# Altium PCB S52最小系统.PcbDoc (part 3 of 9)
Units mm, origin at the board's own origin, x right, y up, seen from the top; angles counter-clockwise.
Board outline 152.4 x 101.6 mm, 2 copper layers (Top Layer, Bottom Layer); 29 components, 53 nets, 176 pads, 2 vias.
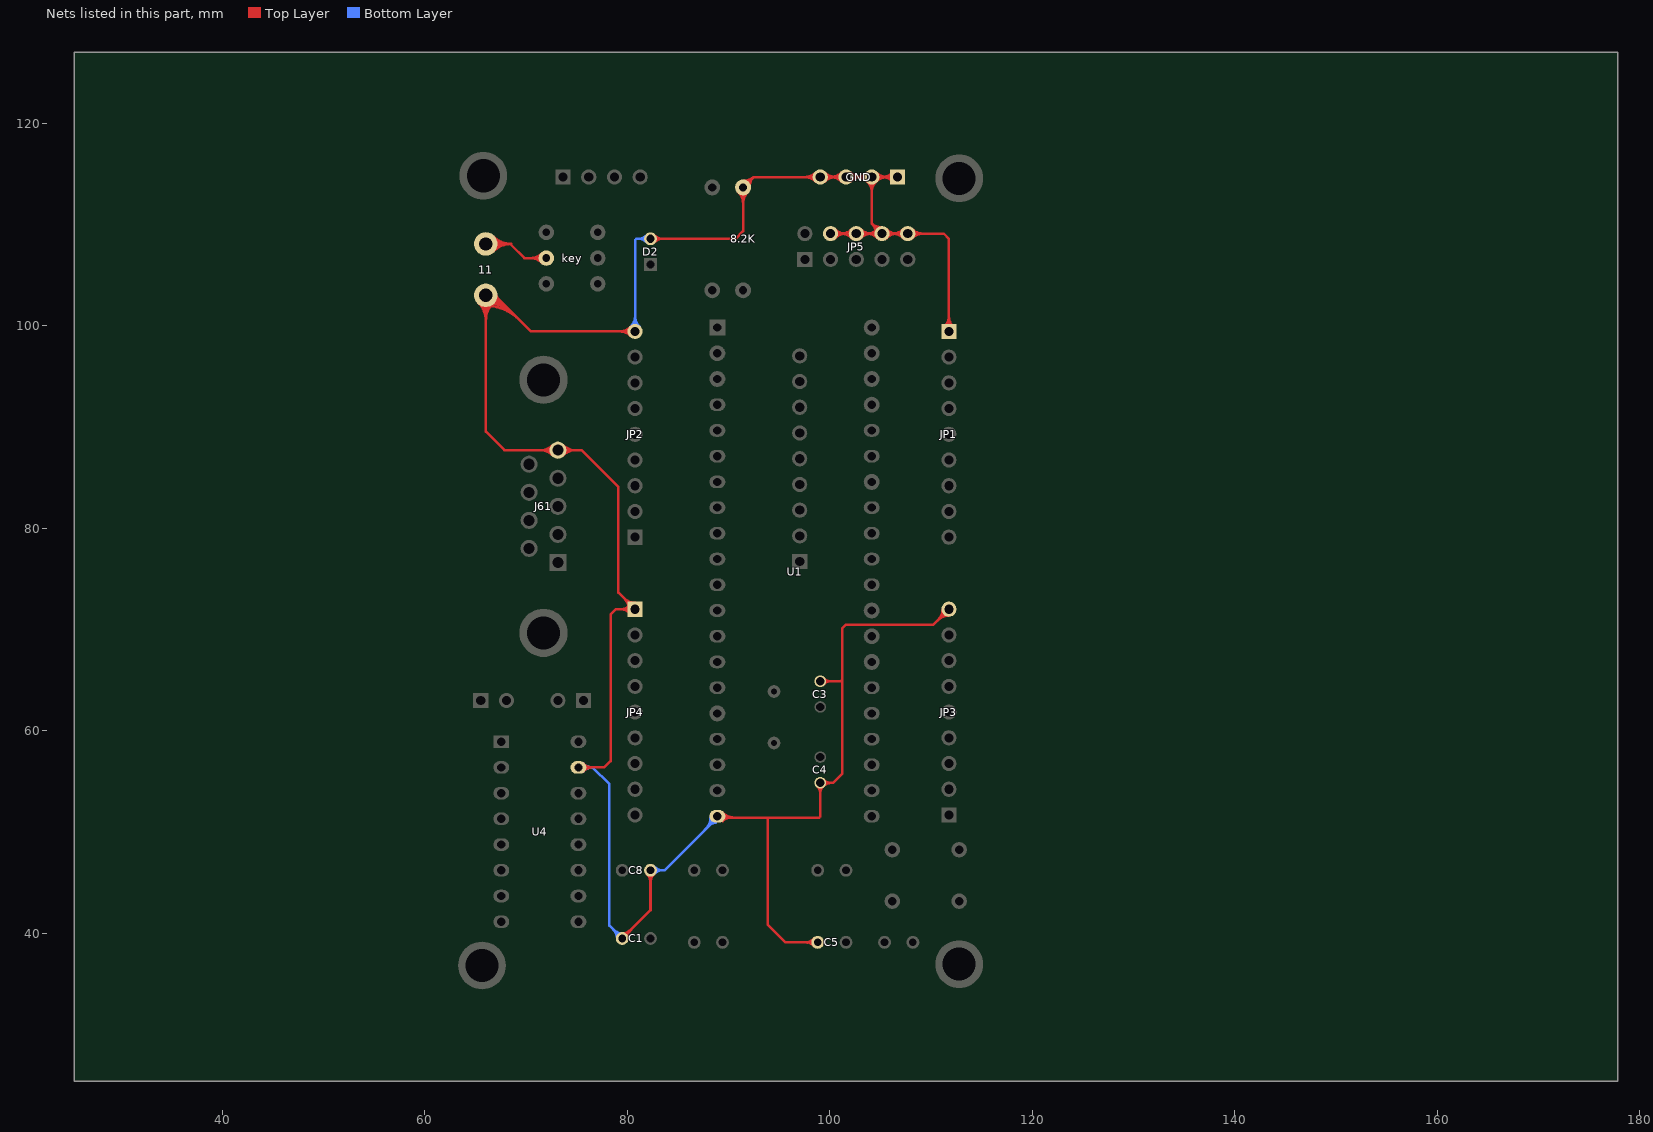
[diagram p3: the nets of this part, all layers, seen from the top]

## Via types
v1: diameter 1.27, hole 0.711, Top Layer to Bottom Layer, 2 vias

## Nets (pads, with @x,y where several pads share a name; then routed paths per layer and width w, separated by ;. In a path a pad name is that pad's centre, name@x,y a point inside that pad or via, vN(x,y) a via of type N, cw(c..) or ccw(c..) an arc to the next point about the centre after c; other vN are vias at no path point) (continued)
GND: (continued)
  Top Layer w0.254: 103.652,109.093 ccw(c103.652,110.597) JP5.8@104.715,109.534 ; 103.652,109.093 cw(c103.652,107.589) JP5.8@104.715,108.652 ; 103.652,109.093 ccw(c103.652,110.597) JP5.8@104.715,109.534 ; 103.652,109.093 cw(c103.652,107.589) JP5.8@104.715,108.652 ; 103.652,109.093 ccw(c103.652,110.597) JP5.8@104.715,109.534 ; 103.652,109.093 ccw(c103.652,110.597) JP5.8@104.715,109.534 ; 103.652,109.093 cw(c103.652,107.589) JP5.8@104.715,108.652 ; 103.652,109.093 ccw(c103.652,110.597) JP5.8@104.715,109.534 ; 103.652,109.093 cw(c103.652,107.589) JP5.8@104.715,108.652 ; 103.652,109.093 ccw(c103.652,110.597) JP5.8@104.715,109.534 ; 103.652,109.093 cw(c103.652,107.589) JP5.8@104.715,108.652 ; 103.652,109.093 ccw(c103.652,110.597) JP5.8@104.715,109.534 ; 103.652,109.093 cw(c103.652,107.589) JP5.8@104.715,108.652 ; 103.652,109.093 ccw(c103.652,110.597) JP5.8@104.715,109.534 ; 103.652,109.093 cw(c103.652,107.589) JP5.8@104.715,108.652 ; 103.652,109.093 ccw(c103.652,110.597) JP5.8@104.715,109.534 ; 103.652,109.093 cw(c103.652,107.589) JP5.8@104.715,108.652 ; 103.652,109.093 ccw(c103.652,110.597) JP5.8@104.715,109.534 ; 103.652,109.093 cw(c103.652,107.589) JP5.8@104.715,108.652 ; GND.2@103.699,114.24 cw(c102.636,113.177) 104.14,113.177 ; GND.2@103.699,114.24 cw(c102.636,113.177) 104.14,113.177 ; GND.2@103.699,114.24 cw(c102.636,113.177) 104.14,113.177 ; GND.2@103.699,114.24 cw(c102.636,113.177) 104.14,113.177 ; GND.2@103.699,114.24 cw(c102.636,113.177) 104.14,113.177 ; GND.2@103.699,114.24 cw(c102.636,113.177) 104.14,113.177 ; GND.2@103.699,114.24 cw(c102.636,113.177) 104.14,113.177 ; GND.2@103.699,114.24 cw(c102.636,113.177) 104.14,113.177 ; GND.2@103.699,114.24 cw(c102.636,113.177) 104.14,113.177 ; GND.2@103.699,114.24 cw(c102.636,113.177) 104.14,113.177 ; GND.2@103.879,114.42 cw(c103.249,113.79) 104.14,113.79 ; GND.2@103.879,114.42 cw(c103.249,113.79) 104.14,113.79 ; GND.2@103.879,114.42 cw(c103.249,113.79) 104.14,113.79 ; GND.2@103.879,114.42 cw(c103.249,113.79) 104.14,113.79 ; GND.2@103.879,114.42 cw(c103.249,113.79) 104.14,113.79 ; GND.2@103.879,114.42 cw(c103.249,113.79) 104.14,113.79 ; GND.2@103.879,114.42 cw(c103.249,113.79) 104.14,113.79 ; GND.2@103.879,114.42 cw(c103.249,113.79) 104.14,113.79 ; GND.2@103.879,114.42 cw(c103.249,113.79) 104.14,113.79 ; GND.2@103.879,114.42 cw(c103.249,113.79) 104.14,113.79 ; 104.14,110.109 cw(c103.189,109.158) JP5.8@104.533,109.113 ; 104.14,110.109 ccw(c105.091,111.06) JP5.8@105.136,109.716 ; 104.14,110.109 cw(c103.189,109.158) JP5.8@104.533,109.113 ; 104.14,110.109 ccw(c105.091,111.06) JP5.8@105.136,109.716 ; 104.14,110.109 cw(c103.189,109.158) JP5.8@104.533,109.113 ; 104.14,110.109 ccw(c105.091,111.06) JP5.8@105.136,109.716 ; 104.14,110.109 ccw(c105.091,111.06) JP5.8@105.136,109.716 ; 104.14,110.109 cw(c103.189,109.158) JP5.8@104.533,109.113 ; 104.14,110.109 ccw(c105.091,111.06) JP5.8@105.136,109.716 ; 104.14,110.109 cw(c103.189,109.158) JP5.8@104.533,109.113 ; 104.14,110.109 ccw(c105.091,111.06) JP5.8@105.136,109.716 ; 104.14,110.109 cw(c103.189,109.158) JP5.8@104.533,109.113 ; 104.14,110.109 ccw(c105.091,111.06) JP5.8@105.136,109.716 ; 104.14,110.109 cw(c103.189,109.158) JP5.8@104.533,109.113 ; 104.14,110.109 ccw(c105.091,111.06) JP5.8@105.136,109.716 ; 104.14,110.109 cw(c103.189,109.158) JP5.8@104.533,109.113 ; 104.14,110.109 ccw(c105.091,111.06) JP5.8@105.136,109.716 ; 104.14,110.109 cw(c103.189,109.158) JP5.8@104.533,109.113 ; 104.14,110.109 ccw(c105.091,111.06) JP5.8@105.136,109.716 ; 104.14,110.109 cw(c103.189,109.158) JP5.8@104.533,109.113 ; 104.14,113.177 cw(c105.644,113.177) GND.2@104.581,114.24 ; 104.14,113.177 cw(c105.644,113.177) GND.2@104.581,114.24 ; 104.14,113.177 cw(c105.644,113.177) GND.2@104.581,114.24 ; 104.14,113.177 cw(c105.644,113.177) GND.2@104.581,114.24 ; 104.14,113.177 cw(c105.644,113.177) GND.2@104.581,114.24 ; 104.14,113.177 cw(c105.644,113.177) GND.2@104.581,114.24 ; 104.14,113.177 cw(c105.644,113.177) GND.2@104.581,114.24 ; 104.14,113.177 cw(c105.644,113.177) GND.2@104.581,114.24 ; 104.14,113.177 cw(c105.644,113.177) GND.2@104.581,114.24 ; 104.14,113.177 cw(c105.644,113.177) GND.2@104.581,114.24 ; 104.14,113.79 cw(c105.031,113.79) GND.2@104.401,114.42 ; 104.14,113.79 cw(c105.031,113.79) GND.2@104.401,114.42 ; 104.14,113.79 cw(c105.031,113.79) GND.2@104.401,114.42 ; 104.14,113.79 cw(c105.031,113.79) GND.2@104.401,114.42 ; 104.14,113.79 cw(c105.031,113.79) GND.2@104.401,114.42 ; 104.14,113.79 cw(c105.031,113.79) GND.2@104.401,114.42 ; 104.14,113.79 cw(c105.031,113.79) GND.2@104.401,114.42 ; 104.14,113.79 cw(c105.031,113.79) GND.2@104.401,114.42 ; 104.14,113.79 cw(c105.031,113.79) GND.2@104.401,114.42 ; 104.14,113.79 cw(c105.031,113.79) GND.2@104.401,114.42 ; 104.265,109.093 cw(c104.265,108.202) JP5.8@104.895,108.832 ; 104.265,109.093 ccw(c104.265,109.984) JP5.8@104.895,109.354 ; 104.265,109.093 cw(c104.265,108.202) JP5.8@104.895,108.832 ; 104.265,109.093 ccw(c104.265,109.984) JP5.8@104.895,109.354 ; 104.265,109.093 cw(c104.265,108.202) JP5.8@104.895,108.832 ; 104.265,109.093 ccw(c104.265,109.984) JP5.8@104.895,109.354 ; 104.265,109.093 ccw(c104.265,109.984) JP5.8@104.895,109.354 ; 104.265,109.093 cw(c104.265,108.202) JP5.8@104.895,108.832 ; 104.265,109.093 ccw(c104.265,109.984) JP5.8@104.895,109.354 ; 104.265,109.093 cw(c104.265,108.202) JP5.8@104.895,108.832 ; 104.265,109.093 ccw(c104.265,109.984) JP5.8@104.895,109.354 ; 104.265,109.093 cw(c104.265,108.202) JP5.8@104.895,108.832 ; 104.265,109.093 ccw(c104.265,109.984) JP5.8@104.895,109.354 ; 104.265,109.093 cw(c104.265,108.202) JP5.8@104.895,108.832 ; 104.265,109.093 ccw(c104.265,109.984) JP5.8@104.895,109.354 ; 104.265,109.093 cw(c104.265,108.202) JP5.8@104.895,108.832 ; 104.265,109.093 ccw(c104.265,109.984) JP5.8@104.895,109.354 ; 104.265,109.093 cw(c104.265,108.202) JP5.8@104.895,108.832 ; 104.265,109.093 ccw(c104.265,109.984) JP5.8@104.895,109.354 ; 104.265,109.093 cw(c104.265,108.202) JP5.8@104.895,108.832 ; GND.2@104.401,114.42 cw(c105.031,113.79) 105.031,114.681 ; GND.2@104.401,114.42 cw(c105.031,113.79) 105.031,114.681 ; GND.2@104.401,114.42 cw(c105.031,113.79) 105.031,114.681 ; GND.2@104.401,114.42 cw(c105.031,113.79) 105.031,114.681 ; GND.2@104.401,114.42 cw(c105.031,113.79) 105.031,114.681 ; GND.2@104.401,114.42 cw(c105.031,113.79) 105.031,114.681 ; GND.2@104.401,114.42 cw(c105.031,113.79) 105.031,114.681 ; GND.2@104.401,114.42 cw(c105.031,113.79) 105.031,114.681 ; GND.2@104.401,114.42 cw(c105.031,113.79) 105.031,114.681 ; GND.2@104.401,114.42 cw(c105.031,113.79) 105.031,114.681 ; GND.2@104.401,114.942 ccw(c105.031,115.572) 105.031,114.681 ; GND.2@104.401,114.942 ccw(c105.031,115.572) 105.031,114.681 ; GND.2@104.401,114.942 ccw(c105.031,115.572) 105.031,114.681 ; GND.2@104.401,114.942 ccw(c105.031,115.572) 105.031,114.681 ; GND.2@104.401,114.942 ccw(c105.031,115.572) 105.031,114.681 ; GND.2@104.401,114.942 ccw(c105.031,115.572) 105.031,114.681 ; GND.2@104.401,114.942 ccw(c105.031,115.572) 105.031,114.681 ; GND.2@104.401,114.942 ccw(c105.031,115.572) 105.031,114.681 ; GND.2@104.401,114.942 ccw(c105.031,115.572) 105.031,114.681 ; GND.2@104.401,114.942 ccw(c105.031,115.572) 105.031,114.681 ; 104.554,109.695 cw(c103.991,109.131) JP5.8@104.787,109.105 ; 104.554,109.695 ccw(c105.118,110.258) JP5.8@105.144,109.462 ; 104.554,109.695 cw(c103.991,109.131) JP5.8@104.787,109.105 ; 104.554,109.695 ccw(c105.118,110.258) JP5.8@105.144,109.462 ; 104.554,109.695 cw(c103.991,109.131) JP5.8@104.787,109.105 ; 104.554,109.695 ccw(c105.118,110.258) JP5.8@105.144,109.462 ; 104.554,109.695 ccw(c105.118,110.258) JP5.8@105.144,109.462 ; 104.554,109.695 cw(c103.991,109.131) JP5.8@104.787,109.105 ; 104.554,109.695 ccw(c105.118,110.258) JP5.8@105.144,109.462 ; 104.554,109.695 cw(c103.991,109.131) JP5.8@104.787,109.105 ; 104.554,109.695 ccw(c105.118,110.258) JP5.8@105.144,109.462 ; 104.554,109.695 cw(c103.991,109.131) JP5.8@104.787,109.105 ; 104.554,109.695 ccw(c105.118,110.258) JP5.8@105.144,109.462 ; 104.554,109.695 cw(c103.991,109.131) JP5.8@104.787,109.105 ; 104.554,109.695 ccw(c105.118,110.258) JP5.8@105.144,109.462 ; 104.554,109.695 cw(c103.991,109.131) JP5.8@104.787,109.105 ; 104.554,109.695 ccw(c105.118,110.258) JP5.8@105.144,109.462 ; 104.554,109.695 cw(c103.991,109.131) JP5.8@104.787,109.105 ; 104.554,109.695 ccw(c105.118,110.258) JP5.8@105.144,109.462 ; 104.554,109.695 cw(c103.991,109.131) JP5.8@104.787,109.105 ; GND.2@104.581,114.24 cw(c105.644,113.177) 105.644,114.681 ; GND.2@104.581,114.24 cw(c105.644,113.177) 105.644,114.681 ; GND.2@104.581,114.24 cw(c105.644,113.177) 105.644,114.681 ; GND.2@104.581,114.24 cw(c105.644,113.177) 105.644,114.681 ; GND.2@104.581,114.24 cw(c105.644,113.177) 105.644,114.681 ; GND.2@104.581,114.24 cw(c105.644,113.177) 105.644,114.681 ; GND.2@104.581,114.24 cw(c105.644,113.177) 105.644,114.681 ; GND.2@104.581,114.24 cw(c105.644,113.177) 105.644,114.681 ; GND.2@104.581,114.24 cw(c105.644,113.177) 105.644,114.681 ; GND.2@104.581,114.24 cw(c105.644,113.177) 105.644,114.681 ; GND.2@104.581,115.122 ccw(c105.644,116.185) 105.644,114.681 ; GND.2@104.581,115.122 ccw(c105.644,116.185) 105.644,114.681 ; GND.2@104.581,115.122 ccw(c105.644,116.185) 105.644,114.681 ; GND.2@104.581,115.122 ccw(c105.644,116.185) 105.644,114.681 ; GND.2@104.581,115.122 ccw(c105.644,116.185) 105.644,114.681 ; GND.2@104.581,115.122 ccw(c105.644,116.185) 105.644,114.681 ; GND.2@104.581,115.122 ccw(c105.644,116.185) 105.644,114.681 ; GND.2@104.581,115.122 ccw(c105.644,116.185) 105.644,114.681 ; GND.2@104.581,115.122 ccw(c105.644,116.185) 105.644,114.681 ; GND.2@104.581,115.122 ccw(c105.644,116.185) 105.644,114.681 ; 105.176,114.681 cw(c105.176,113.177) GND.1@106.239,114.24 ; 105.176,114.681 ccw(c105.176,116.185) GND.1@106.239,115.122 ; 105.176,114.681 cw(c105.176,113.177) GND.1@106.239,114.24 ; 105.176,114.681 ccw(c105.176,116.185) GND.1@106.239,115.122 ; 105.176,114.681 cw(c105.176,113.177) GND.1@106.239,114.24 ; 105.176,114.681 ccw(c105.176,116.185) GND.1@106.239,115.122 ; 105.176,114.681 ccw(c105.176,116.185) GND.1@106.239,115.122 ; 105.176,114.681 cw(c105.176,113.177) GND.1@106.239,114.24 ; 105.176,114.681 ccw(c105.176,116.185) GND.1@106.239,115.122 ; 105.176,114.681 cw(c105.176,113.177) GND.1@106.239,114.24 ; 105.176,114.681 ccw(c105.176,116.185) GND.1@106.239,115.122 ; 105.176,114.681 cw(c105.176,113.177) GND.1@106.239,114.24 ; 105.176,114.681 ccw(c105.176,116.185) GND.1@106.239,115.122 ; 105.176,114.681 cw(c105.176,113.177) GND.1@106.239,114.24 ; 105.176,114.681 ccw(c105.176,116.185) GND.1@106.239,115.122 ; 105.176,114.681 cw(c105.176,113.177) GND.1@106.239,114.24 ; 105.176,114.681 ccw(c105.176,116.185) GND.1@106.239,115.122 ; 105.176,114.681 cw(c105.176,113.177) GND.1@106.239,114.24 ; 105.176,114.681 ccw(c105.176,116.185) GND.1@106.239,115.122 ; 105.176,114.681 cw(c105.176,113.177) GND.1@106.239,114.24 ; JP5.8@105.417,108.832 cw(c106.047,108.202) 106.047,109.093 ; JP5.8@105.417,108.832 cw(c106.047,108.202) 106.047,109.093 ; JP5.8@105.417,108.832 cw(c106.047,108.202) 106.047,109.093 ; JP5.8@105.417,108.832 cw(c106.047,108.202) 106.047,109.093 ; JP5.8@105.417,108.832 cw(c106.047,108.202) 106.047,109.093 ; JP5.8@105.417,108.832 cw(c106.047,108.202) 106.047,109.093 ; JP5.8@105.417,108.832 cw(c106.047,108.202) 106.047,109.093 ; JP5.8@105.417,108.832 cw(c106.047,108.202) 106.047,109.093 ; JP5.8@105.417,108.832 cw(c106.047,108.202) 106.047,109.093 ; JP5.8@105.417,108.832 cw(c106.047,108.202) 106.047,109.093 ; JP5.8@105.417,109.354 ccw(c106.047,109.984) 106.047,109.093 ; JP5.8@105.417,109.354 ccw(c106.047,109.984) 106.047,109.093 ; JP5.8@105.417,109.354 ccw(c106.047,109.984) 106.047,109.093 ; JP5.8@105.417,109.354 ccw(c106.047,109.984) 106.047,109.093 ; JP5.8@105.417,109.354 ccw(c106.047,109.984) 106.047,109.093 ; JP5.8@105.417,109.354 ccw(c106.047,109.984) 106.047,109.093 ; JP5.8@105.417,109.354 ccw(c106.047,109.984) 106.047,109.093 ; JP5.8@105.417,109.354 ccw(c106.047,109.984) 106.047,109.093 ; JP5.8@105.417,109.354 ccw(c106.047,109.984) 106.047,109.093 ; JP5.8@105.417,109.354 ccw(c106.047,109.984) 106.047,109.093 ; JP5.8@105.597,108.652 cw(c106.66,107.589) 106.66,109.093 ; JP5.8@105.597,108.652 cw(c106.66,107.589) 106.66,109.093 ; JP5.8@105.597,108.652 cw(c106.66,107.589) 106.66,109.093 ; JP5.8@105.597,108.652 cw(c106.66,107.589) 106.66,109.093 ; JP5.8@105.597,108.652 cw(c106.66,107.589) 106.66,109.093 ; JP5.8@105.597,108.652 cw(c106.66,107.589) 106.66,109.093 ; JP5.8@105.597,108.652 cw(c106.66,107.589) 106.66,109.093 ; JP5.8@105.597,108.652 cw(c106.66,107.589) 106.66,109.093 ; JP5.8@105.597,108.652 cw(c106.66,107.589) 106.66,109.093 ; JP5.8@105.597,108.652 cw(c106.66,107.589) 106.66,109.093 ; JP5.8@105.597,109.534 ccw(c106.66,110.597) 106.66,109.093 ; JP5.8@105.597,109.534 ccw(c106.66,110.597) 106.66,109.093 ; JP5.8@105.597,109.534 ccw(c106.66,110.597) 106.66,109.093 ; JP5.8@105.597,109.534 ccw(c106.66,110.597) 106.66,109.093 ; JP5.8@105.597,109.534 ccw(c106.66,110.597) 106.66,109.093 ; JP5.8@105.597,109.534 ccw(c106.66,110.597) 106.66,109.093 ; JP5.8@105.597,109.534 ccw(c106.66,110.597) 106.66,109.093 ; JP5.8@105.597,109.534 ccw(c106.66,110.597) 106.66,109.093 ; JP5.8@105.597,109.534 ccw(c106.66,110.597) 106.66,109.093 ; JP5.8@105.597,109.534 ccw(c106.66,110.597) 106.66,109.093 ; 105.789,114.681 cw(c105.789,113.79) GND.1@106.419,114.42 ; 105.789,114.681 ccw(c105.789,115.572) GND.1@106.419,114.942 ; 105.789,114.681 cw(c105.789,113.79) GND.1@106.419,114.42 ; 105.789,114.681 ccw(c105.789,115.572) GND.1@106.419,114.942 ; 105.789,114.681 cw(c105.789,113.79) GND.1@106.419,114.42 ; 105.789,114.681 ccw(c105.789,115.572) GND.1@106.419,114.942 ; 105.789,114.681 ccw(c105.789,115.572) GND.1@106.419,114.942 ; 105.789,114.681 cw(c105.789,113.79) GND.1@106.419,114.42 ; 105.789,114.681 ccw(c105.789,115.572) GND.1@106.419,114.942 ; 105.789,114.681 cw(c105.789,113.79) GND.1@106.419,114.42 ; 105.789,114.681 ccw(c105.789,115.572) GND.1@106.419,114.942 ; 105.789,114.681 cw(c105.789,113.79) GND.1@106.419,114.42 ; 105.789,114.681 ccw(c105.789,115.572) GND.1@106.419,114.942 ; 105.789,114.681 cw(c105.789,113.79) GND.1@106.419,114.42 ; 105.789,114.681 ccw(c105.789,115.572) GND.1@106.419,114.942 ; 105.789,114.681 cw(c105.789,113.79) GND.1@106.419,114.42 ; 105.789,114.681 ccw(c105.789,115.572) GND.1@106.419,114.942 ; 105.789,114.681 cw(c105.789,113.79) GND.1@106.419,114.42 ; 105.789,114.681 ccw(c105.789,115.572) GND.1@106.419,114.942 ; 105.789,114.681 cw(c105.789,113.79) GND.1@106.419,114.42 ; 106.192,109.093 cw(c106.192,107.589) JP5.10@107.255,108.652 ; 106.192,109.093 ccw(c106.192,110.597) JP5.10@107.255,109.534 ; 106.192,109.093 cw(c106.192,107.589) JP5.10@107.255,108.652 ; 106.192,109.093 ccw(c106.192,110.597) JP5.10@107.255,109.534 ; 106.192,109.093 cw(c106.192,107.589) JP5.10@107.255,108.652 ; 106.192,109.093 ccw(c106.192,110.597) JP5.10@107.255,109.534 ; 106.192,109.093 ccw(c106.192,110.597) JP5.10@107.255,109.534 ; 106.192,109.093 cw(c106.192,107.589) JP5.10@107.255,108.652 ; 106.192,109.093 ccw(c106.192,110.597) JP5.10@107.255,109.534 ; 106.192,109.093 cw(c106.192,107.589) JP5.10@107.255,108.652 ; 106.192,109.093 ccw(c106.192,110.597) JP5.10@107.255,109.534 ; 106.192,109.093 cw(c106.192,107.589) JP5.10@107.255,108.652 ; 106.192,109.093 ccw(c106.192,110.597) JP5.10@107.255,109.534 ; 106.192,109.093 cw(c106.192,107.589) JP5.10@107.255,108.652 ; 106.192,109.093 ccw(c106.192,110.597) JP5.10@107.255,109.534 ; 106.192,109.093 cw(c106.192,107.589) JP5.10@107.255,108.652 ; 106.192,109.093 ccw(c106.192,110.597) JP5.10@107.255,109.534 ; 106.192,109.093 cw(c106.192,107.589) JP5.10@107.255,108.652 ; 106.192,109.093 ccw(c106.192,110.597) JP5.10@107.255,109.534 ; 106.192,109.093 cw(c106.192,107.589) JP5.10@107.255,108.652 ; 106.805,109.093 cw(c106.805,108.202) JP5.10@107.435,108.832 ; 106.805,109.093 ccw(c106.805,109.984) JP5.10@107.435,109.354 ; 106.805,109.093 cw(c106.805,108.202) JP5.10@107.435,108.832 ; 106.805,109.093 ccw(c106.805,109.984) JP5.10@107.435,109.354 ; 106.805,109.093 cw(c106.805,108.202) JP5.10@107.435,108.832 ; 106.805,109.093 ccw(c106.805,109.984) JP5.10@107.435,109.354 ; 106.805,109.093 ccw(c106.805,109.984) JP5.10@107.435,109.354 ; 106.805,109.093 cw(c106.805,108.202) JP5.10@107.435,108.832 ; 106.805,109.093 ccw(c106.805,109.984) JP5.10@107.435,109.354 ; 106.805,109.093 cw(c106.805,108.202) JP5.10@107.435,108.832 ; 106.805,109.093 ccw(c106.805,109.984) JP5.10@107.435,109.354 ; 106.805,109.093 cw(c106.805,108.202) JP5.10@107.435,108.832 ; 106.805,109.093 ccw(c106.805,109.984) JP5.10@107.435,109.354 ; 106.805,109.093 cw(c106.805,108.202) JP5.10@107.435,108.832 ; 106.805,109.093 ccw(c106.805,109.984) JP5.10@107.435,109.354 ; 106.805,109.093 cw(c106.805,108.202) JP5.10@107.435,108.832 ; 106.805,109.093 ccw(c106.805,109.984) JP5.10@107.435,109.354 ; 106.805,109.093 cw(c106.805,108.202) JP5.10@107.435,108.832 ; 106.805,109.093 ccw(c106.805,109.984) JP5.10@107.435,109.354 ; 106.805,109.093 cw(c106.805,108.202) JP5.10@107.435,108.832 ; JP5.10@107.957,108.832 cw(c108.587,108.202) 108.587,109.093 ; JP5.10@107.957,108.832 cw(c108.587,108.202) 108.587,109.093 ; JP5.10@107.957,108.832 cw(c108.587,108.202) 108.587,109.093 ; JP5.10@107.957,108.832 cw(c108.587,108.202) 108.587,109.093 ; JP5.10@107.957,108.832 cw(c108.587,108.202) 108.587,109.093 ; JP5.10@107.957,108.832 cw(c108.587,108.202) 108.587,109.093 ; JP5.10@107.957,108.832 cw(c108.587,108.202) 108.587,109.093 ; JP5.10@107.957,108.832 cw(c108.587,108.202) 108.587,109.093 ; JP5.10@107.957,108.832 cw(c108.587,108.202) 108.587,109.093 ; JP5.10@107.957,108.832 cw(c108.587,108.202) 108.587,109.093 ; JP5.10@107.957,109.354 ccw(c108.587,109.984) 108.587,109.093 ; JP5.10@107.957,109.354 ccw(c108.587,109.984) 108.587,109.093 ; JP5.10@107.957,109.354 ccw(c108.587,109.984) 108.587,109.093 ; JP5.10@107.957,109.354 ccw(c108.587,109.984) 108.587,109.093 ; JP5.10@107.957,109.354 ccw(c108.587,109.984) 108.587,109.093 ; JP5.10@107.957,109.354 ccw(c108.587,109.984) 108.587,109.093 ; JP5.10@107.957,109.354 ccw(c108.587,109.984) 108.587,109.093 ; JP5.10@107.957,109.354 ccw(c108.587,109.984) 108.587,109.093 ; JP5.10@107.957,109.354 ccw(c108.587,109.984) 108.587,109.093 ; JP5.10@107.957,109.354 ccw(c108.587,109.984) 108.587,109.093 ; JP5.10@108.137,108.652 cw(c109.2,107.589) 109.2,109.093 ; JP5.10@108.137,108.652 cw(c109.2,107.589) 109.2,109.093 ; JP5.10@108.137,108.652 cw(c109.2,107.589) 109.2,109.093 ; JP5.10@108.137,108.652 cw(c109.2,107.589) 109.2,109.093 ; JP5.10@108.137,108.652 cw(c109.2,107.589) 109.2,109.093 ; JP5.10@108.137,108.652 cw(c109.2,107.589) 109.2,109.093 ; JP5.10@108.137,108.652 cw(c109.2,107.589) 109.2,109.093 ; JP5.10@108.137,108.652 cw(c109.2,107.589) 109.2,109.093 ; JP5.10@108.137,108.652 cw(c109.2,107.589) 109.2,109.093 ; JP5.10@108.137,108.652 cw(c109.2,107.589) 109.2,109.093 ; JP5.10@108.137,109.534 ccw(c109.2,110.597) 109.2,109.093 ; JP5.10@108.137,109.534 ccw(c109.2,110.597) 109.2,109.093 ; JP5.10@108.137,109.534 ccw(c109.2,110.597) 109.2,109.093 ; JP5.10@108.137,109.534 ccw(c109.2,110.597) 109.2,109.093 ; JP5.10@108.137,109.534 ccw(c109.2,110.597) 109.2,109.093 ; JP5.10@108.137,109.534 ccw(c109.2,110.597) 109.2,109.093 ; JP5.10@108.137,109.534 ccw(c109.2,110.597) 109.2,109.093 ; JP5.10@108.137,109.534 ccw(c109.2,110.597) 109.2,109.093 ; JP5.10@108.137,109.534 ccw(c109.2,110.597) 109.2,109.093 ; JP5.10@108.137,109.534 ccw(c109.2,110.597) 109.2,109.093 ; 110.696,70.945 cw(c111.76,69.882) JP3.9@111.76,71.386 ; 110.696,70.945 ccw(c109.633,72.009) JP3.9@111.137,72.009 ; 110.696,70.945 cw(c111.76,69.882) JP3.9@111.76,71.386 ; 110.696,70.945 ccw(c109.633,72.009) JP3.9@111.137,72.009 ; 110.696,70.945 cw(c111.76,69.882) JP3.9@111.76,71.386 ; 110.696,70.945 ccw(c109.633,72.009) JP3.9@111.137,72.009 ; 110.696,70.945 ccw(c109.633,72.009) JP3.9@111.137,72.009 ; 110.696,70.945 cw(c111.76,69.882) JP3.9@111.76,71.386 ; 110.696,70.945 ccw(c109.633,72.009) JP3.9@111.137,72.009 ; 110.696,70.945 cw(c111.76,69.882) JP3.9@111.76,71.386 ; 110.696,70.945 ccw(c109.633,72.009) JP3.9@111.137,72.009 ; 110.696,70.945 cw(c111.76,69.882) JP3.9@111.76,71.386 ; 110.696,70.945 ccw(c109.633,72.009) JP3.9@111.137,72.009 ; 110.696,70.945 cw(c111.76,69.882) JP3.9@111.76,71.386 ; 110.696,70.945 ccw(c109.633,72.009) JP3.9@111.137,72.009 ; 110.696,70.945 cw(c111.76,69.882) JP3.9@111.76,71.386 ; 110.696,70.945 ccw(c109.633,72.009) JP3.9@111.137,72.009 ; 110.696,70.945 cw(c111.76,69.882) JP3.9@111.76,71.386 ; 110.696,70.945 ccw(c109.633,72.009) JP3.9@111.137,72.009 ; 110.696,70.945 cw(c111.76,69.882) JP3.9@111.76,71.386 ; 111.13,71.379 cw(c111.76,70.749) JP3.9@111.76,71.64 ; 111.13,71.379 ccw(c110.5,72.009) JP3.9@111.391,72.009 ; 111.13,71.379 cw(c111.76,70.749) JP3.9@111.76,71.64 ; 111.13,71.379 ccw(c110.5,72.009) JP3.9@111.391,72.009 ; 111.13,71.379 cw(c111.76,70.749) JP3.9@111.76,71.64 ; 111.13,71.379 ccw(c110.5,72.009) JP3.9@111.391,72.009 ; 111.13,71.379 ccw(c110.5,72.009) JP3.9@111.391,72.009 ; 111.13,71.379 cw(c111.76,70.749) JP3.9@111.76,71.64 ; 111.13,71.379 ccw(c110.5,72.009) JP3.9@111.391,72.009 ; 111.13,71.379 cw(c111.76,70.749) JP3.9@111.76,71.64 ; 111.13,71.379 ccw(c110.5,72.009) JP3.9@111.391,72.009 ; 111.13,71.379 cw(c111.76,70.749) JP3.9@111.76,71.64 ; 111.13,71.379 ccw(c110.5,72.009) JP3.9@111.391,72.009 ; 111.13,71.379 cw(c111.76,70.749) JP3.9@111.76,71.64 ; 111.13,71.379 ccw(c110.5,72.009) JP3.9@111.391,72.009 ; 111.13,71.379 cw(c111.76,70.749) JP3.9@111.76,71.64 ; 111.13,71.379 ccw(c110.5,72.009) JP3.9@111.391,72.009 ; 111.13,71.379 cw(c111.76,70.749) JP3.9@111.76,71.64 ; 111.13,71.379 ccw(c110.5,72.009) JP3.9@111.391,72.009 ; 111.13,71.379 cw(c111.76,70.749) JP3.9@111.76,71.64 ; JP1.1@111.319,99.882 ccw(c110.256,100.945) 111.76,100.945 ; JP1.1@111.319,99.882 ccw(c110.256,100.945) 111.76,100.945 ; JP1.1@111.319,99.882 ccw(c110.256,100.945) 111.76,100.945 ; JP1.1@111.319,99.882 ccw(c110.256,100.945) 111.76,100.945 ; JP1.1@111.319,99.882 ccw(c110.256,100.945) 111.76,100.945 ; JP1.1@111.319,99.882 ccw(c110.256,100.945) 111.76,100.945 ; JP1.1@111.319,99.882 ccw(c110.256,100.945) 111.76,100.945 ; JP1.1@111.319,99.882 ccw(c110.256,100.945) 111.76,100.945 ; JP1.1@111.319,99.882 ccw(c110.256,100.945) 111.76,100.945 ; JP1.1@111.319,99.882 ccw(c110.256,100.945) 111.76,100.945 ; JP1.1@111.499,99.702 ccw(c110.869,100.332) 111.76,100.332 ; JP1.1@111.499,99.702 ccw(c110.869,100.332) 111.76,100.332 ; JP1.1@111.499,99.702 ccw(c110.869,100.332) 111.76,100.332 ; JP1.1@111.499,99.702 ccw(c110.869,100.332) 111.76,100.332 ; JP1.1@111.499,99.702 ccw(c110.869,100.332) 111.76,100.332 ; JP1.1@111.499,99.702 ccw(c110.869,100.332) 111.76,100.332 ; JP1.1@111.499,99.702 ccw(c110.869,100.332) 111.76,100.332 ; JP1.1@111.499,99.702 ccw(c110.869,100.332) 111.76,100.332 ; JP1.1@111.499,99.702 ccw(c110.869,100.332) 111.76,100.332 ; JP1.1@111.499,99.702 ccw(c110.869,100.332) 111.76,100.332 ; 111.76,100.332 ccw(c112.651,100.332) JP1.1@112.021,99.702 ; 111.76,100.332 ccw(c112.651,100.332) JP1.1@112.021,99.702 ; 111.76,100.332 ccw(c112.651,100.332) JP1.1@112.021,99.702 ; 111.76,100.332 ccw(c112.651,100.332) JP1.1@112.021,99.702 ; 111.76,100.332 ccw(c112.651,100.332) JP1.1@112.021,99.702 ; 111.76,100.332 ccw(c112.651,100.332) JP1.1@112.021,99.702 ; 111.76,100.332 ccw(c112.651,100.332) JP1.1@112.021,99.702 ; 111.76,100.332 ccw(c112.651,100.332) JP1.1@112.021,99.702 ; 111.76,100.332 ccw(c112.651,100.332) JP1.1@112.021,99.702 ; 111.76,100.332 ccw(c112.651,100.332) JP1.1@112.021,99.702 ; 111.76,100.945 ccw(c113.264,100.945) JP1.1@112.201,99.882 ; 111.76,100.945 ccw(c113.264,100.945) JP1.1@112.201,99.882 ; 111.76,100.945 ccw(c113.264,100.945) JP1.1@112.201,99.882 ; 111.76,100.945 ccw(c113.264,100.945) JP1.1@112.201,99.882 ; 111.76,100.945 ccw(c113.264,100.945) JP1.1@112.201,99.882 ; 111.76,100.945 ccw(c113.264,100.945) JP1.1@112.201,99.882 ; 111.76,100.945 ccw(c113.264,100.945) JP1.1@112.201,99.882 ; 111.76,100.945 ccw(c113.264,100.945) JP1.1@112.201,99.882 ; 111.76,100.945 ccw(c113.264,100.945) JP1.1@112.201,99.882 ; 111.76,100.945 ccw(c113.264,100.945) JP1.1@112.201,99.882
  Bottom Layer w0.254: U4.15@75.18,56.387 76.582,56.387 78.232,54.737 78.232,40.767 C1.2@79.502,39.497 ; JP2.9@80.772,99.441 80.772,108.458 80.899,108.585 D2.2@82.296,108.585 ; C8.1@82.296,46.228 83.69,46.228 U1.20@88.896,51.434 ; U4.15@75.695,56.035 cw(c76.545,55.185) 76.545,56.387 ; U4.15@75.695,56.035 cw(c76.545,55.185) 76.545,56.387 ; U4.15@75.695,56.035 cw(c76.545,55.185) 76.545,56.387 ; U4.15@75.695,56.035 cw(c76.545,55.185) 76.545,56.387 ; U4.15@75.695,56.035 cw(c76.545,55.185) 76.545,56.387 ; U4.15@75.695,56.035 cw(c76.545,55.185) 76.545,56.387 ; U4.15@75.695,56.035 cw(c76.545,55.185) 76.545,56.387 ; U4.15@75.695,56.035 cw(c76.545,55.185) 76.545,56.387 ; U4.15@75.695,56.035 cw(c76.545,55.185) 76.545,56.387 ; U4.15@75.695,56.035 cw(c76.545,55.185) 76.545,56.387 ; U4.15@75.695,56.739 ccw(c76.545,57.589) 76.545,56.387 ; U4.15@75.695,56.739 ccw(c76.545,57.589) 76.545,56.387 ; U4.15@75.695,56.739 ccw(c76.545,57.589) 76.545,56.387 ; U4.15@75.695,56.739 ccw(c76.545,57.589) 76.545,56.387 ; U4.15@75.695,56.739 ccw(c76.545,57.589) 76.545,56.387 ; U4.15@75.695,56.739 ccw(c76.545,57.589) 76.545,56.387 ; U4.15@75.695,56.739 ccw(c76.545,57.589) 76.545,56.387 ; U4.15@75.695,56.739 ccw(c76.545,57.589) 76.545,56.387 ; U4.15@75.695,56.739 ccw(c76.545,57.589) 76.545,56.387 ; U4.15@75.695,56.739 ccw(c76.545,57.589) 76.545,56.387 ; 78.635,40.364 cw(c77.768,39.497) C1.2@78.994,39.497 ; 78.635,40.364 ccw(c79.502,41.231) C1.2@79.502,40.005 ; 78.635,40.364 cw(c77.768,39.497) C1.2@78.994,39.497 ; 78.635,40.364 ccw(c79.502,41.231) C1.2@79.502,40.005 ; 78.635,40.364 cw(c77.768,39.497) C1.2@78.994,39.497 ; 78.635,40.364 ccw(c79.502,41.231) C1.2@79.502,40.005 ; 78.635,40.364 ccw(c79.502,41.231) C1.2@79.502,40.005 ; 78.635,40.364 cw(c77.768,39.497) C1.2@78.994,39.497 ; 78.635,40.364 ccw(c79.502,41.231) C1.2@79.502,40.005 ; 78.635,40.364 cw(c77.768,39.497) C1.2@78.994,39.497 ; 78.635,40.364 ccw(c79.502,41.231) C1.2@79.502,40.005 ; 78.635,40.364 cw(c77.768,39.497) C1.2@78.994,39.497 ; 78.635,40.364 ccw(c79.502,41.231) C1.2@79.502,40.005 ; 78.635,40.364 cw(c77.768,39.497) C1.2@78.994,39.497 ; 78.635,40.364 ccw(c79.502,41.231) C1.2@79.502,40.005 ; 78.635,40.364 cw(c77.768,39.497) C1.2@78.994,39.497 ; 78.635,40.364 ccw(c79.502,41.231) C1.2@79.502,40.005 ; 78.635,40.364 cw(c77.768,39.497) C1.2@78.994,39.497 ; 78.635,40.364 ccw(c79.502,41.231) C1.2@79.502,40.005 ; 78.635,40.364 cw(c77.768,39.497) C1.2@78.994,39.497 ; JP2.9@80.331,99.882 ccw(c79.268,100.945) 80.772,100.945 ; JP2.9@80.331,99.882 ccw(c79.268,100.945) 80.772,100.945 ; JP2.9@80.331,99.882 ccw(c79.268,100.945) 80.772,100.945 ; JP2.9@80.331,99.882 ccw(c79.268,100.945) 80.772,100.945 ; JP2.9@80.331,99.882 ccw(c79.268,100.945) 80.772,100.945 ; JP2.9@80.331,99.882 ccw(c79.268,100.945) 80.772,100.945 ; JP2.9@80.331,99.882 ccw(c79.268,100.945) 80.772,100.945 ; JP2.9@80.331,99.882 ccw(c79.268,100.945) 80.772,100.945 ; JP2.9@80.331,99.882 ccw(c79.268,100.945) 80.772,100.945 ; JP2.9@80.331,99.882 ccw(c79.268,100.945) 80.772,100.945 ; JP2.9@80.511,99.702 ccw(c79.881,100.332) 80.772,100.332 ; JP2.9@80.511,99.702 ccw(c79.881,100.332) 80.772,100.332 ; JP2.9@80.511,99.702 ccw(c79.881,100.332) 80.772,100.332 ; JP2.9@80.511,99.702 ccw(c79.881,100.332) 80.772,100.332 ; JP2.9@80.511,99.702 ccw(c79.881,100.332) 80.772,100.332 ; JP2.9@80.511,99.702 ccw(c79.881,100.332) 80.772,100.332 ; JP2.9@80.511,99.702 ccw(c79.881,100.332) 80.772,100.332 ; JP2.9@80.511,99.702 ccw(c79.881,100.332) 80.772,100.332 ; JP2.9@80.511,99.702 ccw(c79.881,100.332) 80.772,100.332 ; JP2.9@80.511,99.702 ccw(c79.881,100.332) 80.772,100.332 ; 80.772,100.332 ccw(c81.663,100.332) JP2.9@81.033,99.702 ; 80.772,100.332 ccw(c81.663,100.332) JP2.9@81.033,99.702 ; 80.772,100.332 ccw(c81.663,100.332) JP2.9@81.033,99.702 ; 80.772,100.332 ccw(c81.663,100.332) JP2.9@81.033,99.702 ; 80.772,100.332 ccw(c81.663,100.332) JP2.9@81.033,99.702 ; 80.772,100.332 ccw(c81.663,100.332) JP2.9@81.033,99.702 ; 80.772,100.332 ccw(c81.663,100.332) JP2.9@81.033,99.702 ; 80.772,100.332 ccw(c81.663,100.332) JP2.9@81.033,99.702 ; 80.772,100.332 ccw(c81.663,100.332) JP2.9@81.033,99.702 ; 80.772,100.332 ccw(c81.663,100.332) JP2.9@81.033,99.702 ; 80.772,100.945 ccw(c82.276,100.945) JP2.9@81.213,99.882 ; 80.772,100.945 ccw(c82.276,100.945) JP2.9@81.213,99.882 ; 80.772,100.945 ccw(c82.276,100.945) JP2.9@81.213,99.882 ; 80.772,100.945 ccw(c82.276,100.945) JP2.9@81.213,99.882 ; 80.772,100.945 ccw(c82.276,100.945) JP2.9@81.213,99.882 ; 80.772,100.945 ccw(c82.276,100.945) JP2.9@81.213,99.882 ; 80.772,100.945 ccw(c82.276,100.945) JP2.9@81.213,99.882 ; 80.772,100.945 ccw(c82.276,100.945) JP2.9@81.213,99.882 ; 80.772,100.945 ccw(c82.276,100.945) JP2.9@81.213,99.882 ; 80.772,100.945 ccw(c82.276,100.945) JP2.9@81.213,99.882 ; 81.07,108.585 cw(c81.07,107.359) D2.2@81.937,108.226 ; 81.07,108.585 ccw(c81.07,109.811) D2.2@81.937,108.944 ; 81.07,108.585 cw(c81.07,107.359) D2.2@81.937,108.226 ; 81.07,108.585 ccw(c81.07,109.811) D2.2@81.937,108.944 ; 81.07,108.585 cw(c81.07,107.359) D2.2@81.937,108.226 ; 81.07,108.585 ccw(c81.07,109.811) D2.2@81.937,108.944 ; 81.07,108.585 ccw(c81.07,109.811) D2.2@81.937,108.944 ; 81.07,108.585 cw(c81.07,107.359) D2.2@81.937,108.226 ; 81.07,108.585 ccw(c81.07,109.811) D2.2@81.937,108.944 ; 81.07,108.585 cw(c81.07,107.359) D2.2@81.937,108.226 ; 81.07,108.585 ccw(c81.07,109.811) D2.2@81.937,108.944 ; 81.07,108.585 cw(c81.07,107.359) D2.2@81.937,108.226 ; 81.07,108.585 ccw(c81.07,109.811) D2.2@81.937,108.944 ; 81.07,108.585 cw(c81.07,107.359) D2.2@81.937,108.226 ; 81.07,108.585 ccw(c81.07,109.811) D2.2@81.937,108.944 ; 81.07,108.585 cw(c81.07,107.359) D2.2@81.937,108.226 ; 81.07,108.585 ccw(c81.07,109.811) D2.2@81.937,108.944 ; 81.07,108.585 cw(c81.07,107.359) D2.2@81.937,108.226 ; 81.07,108.585 ccw(c81.07,109.811) D2.2@81.937,108.944 ; 81.07,108.585 cw(c81.07,107.359) D2.2@81.937,108.226 ; C8.1@82.655,45.869 cw(c83.522,45.002) 83.522,46.228 ; C8.1@82.655,45.869 cw(c83.522,45.002) 83.522,46.228 ; C8.1@82.655,45.869 cw(c83.522,45.002) 83.522,46.228 ; C8.1@82.655,45.869 cw(c83.522,45.002) 83.522,46.228 ; C8.1@82.655,45.869 cw(c83.522,45.002) 83.522,46.228 ; C8.1@82.655,45.869 cw(c83.522,45.002) 83.522,46.228 ; C8.1@82.655,45.869 cw(c83.522,45.002) 83.522,46.228 ; C8.1@82.655,45.869 cw(c83.522,45.002) 83.522,46.228 ; C8.1@82.655,45.869 cw(c83.522,45.002) 83.522,46.228 ; C8.1@82.655,45.869 cw(c83.522,45.002) 83.522,46.228 ; C8.1@82.655,46.587 ccw(c83.522,47.454) 83.522,46.228 ; C8.1@82.655,46.587 ccw(c83.522,47.454) 83.522,46.228 ; C8.1@82.655,46.587 ccw(c83.522,47.454) 83.522,46.228 ; C8.1@82.655,46.587 ccw(c83.522,47.454) 83.522,46.228 ; C8.1@82.655,46.587 ccw(c83.522,47.454) 83.522,46.228 ; C8.1@82.655,46.587 ccw(c83.522,47.454) 83.522,46.228 ; C8.1@82.655,46.587 ccw(c83.522,47.454) 83.522,46.228 ; C8.1@82.655,46.587 ccw(c83.522,47.454) 83.522,46.228 ; C8.1@82.655,46.587 ccw(c83.522,47.454) 83.522,46.228 ; C8.1@82.655,46.587 ccw(c83.522,47.454) 83.522,46.228 ; 87.679,50.217 ccw(c86.335,51.561) U1.20@88.236,51.561 ; 87.679,50.217 ccw(c86.335,51.561) U1.20@88.236,51.561 ; 87.679,50.217 ccw(c86.335,51.561) U1.20@88.236,51.561 ; 87.679,50.217 ccw(c86.335,51.561) U1.20@88.236,51.561 ; 87.769,50.307 ccw(c86.641,51.434) U1.20@88.236,51.434 ; 87.769,50.307 ccw(c86.641,51.434) U1.20@88.236,51.434 ; 87.769,50.307 ccw(c86.641,51.434) U1.20@88.236,51.434 ; 87.769,50.307 ccw(c86.641,51.434) U1.20@88.236,51.434 ; 87.769,50.307 ccw(c86.641,51.434) U1.20@88.236,51.434 ; 87.769,50.307 ccw(c86.641,51.434) U1.20@88.236,51.434 ; 88.113,50.65 ccw(c87.202,51.561) U1.20@88.49,51.561 ; 88.113,50.65 ccw(c87.202,51.561) U1.20@88.49,51.561 ; 88.113,50.65 ccw(c87.202,51.561) U1.20@88.49,51.561 ; 88.113,50.65 ccw(c87.202,51.561) U1.20@88.49,51.561 ; 88.161,50.699 cw(c88.734,50.126) U1.20@88.734,50.936 ; 88.161,50.699 cw(c88.734,50.126) U1.20@88.734,50.936 ; 88.161,50.699 cw(c88.734,50.126) U1.20@88.734,50.936 ; 88.161,50.699 cw(c88.734,50.126) U1.20@88.734,50.936 ; 88.161,50.699 cw(c88.734,50.126) U1.20@88.734,50.936 ; 88.161,50.699 cw(c88.734,50.126) U1.20@88.734,50.936 ; 88.202,50.74 ccw(c87.509,51.434) U1.20@88.49,51.434 ; 88.202,50.74 ccw(c87.509,51.434) U1.20@88.49,51.434 ; 88.202,50.74 ccw(c87.509,51.434) U1.20@88.49,51.434 ; 88.202,50.74 ccw(c87.509,51.434) U1.20@88.49,51.434 ; 88.202,50.74 ccw(c87.509,51.434) U1.20@88.49,51.434 ; 88.202,50.74 ccw(c87.509,51.434) U1.20@88.49,51.434 ; 88.378,50.915 cw(c88.734,50.559) U1.20@88.734,51.063 ; 88.378,50.915 cw(c88.734,50.559) U1.20@88.734,51.063 ; 88.378,50.915 cw(c88.734,50.559) U1.20@88.734,51.063 ; 88.378,50.915 cw(c88.734,50.559) U1.20@88.734,51.063
Net11_1: 11.1 key.1@72.009,106.68 | length 52.6
  Top Layer w0.254: key.1@72.009,106.68 69.85,106.68 68.534,107.996 68.534,108.077 ; 67.307,108.077 cw(c67.307,109.344) 66.411,108.448 ccw(c67.307,109.344) 67.307,108.077 ; 67.307,108.077 ccw(c67.307,106.81) 66.411,107.706 cw(c67.307,106.81) 67.307,108.077 ; 67.921,108.077 cw(c67.921,109.958) 66.591,108.628 ccw(c67.921,109.958) 67.921,108.077 ; 67.921,108.077 ccw(c67.921,106.196) 66.591,107.526 cw(c67.921,106.196) 67.921,108.077 ; 68.534,108.077 cw(c68.534,110.571) 66.77,108.807 ccw(c68.534,110.571) 68.534,108.077 ; 68.534,108.077 ccw(c68.534,105.583) 66.77,107.347 cw(c68.534,105.583) 68.534,108.077 ; 70.476,106.68 cw(c70.476,105.147) key.1@71.56,106.231 ; 70.476,106.68 ccw(c70.476,108.213) key.1@71.56,107.129 ; 70.476,106.68 cw(c70.476,105.147) key.1@71.56,106.231 ; 70.476,106.68 ccw(c70.476,108.213) key.1@71.56,107.129 ; 70.476,106.68 ccw(c70.476,108.213) key.1@71.56,107.129 ; 70.476,106.68 cw(c70.476,105.147) key.1@71.56,106.231 ; 70.476,106.68 ccw(c70.476,108.213) key.1@71.56,107.129 ; 70.476,106.68 cw(c70.476,105.147) key.1@71.56,106.231 ; 70.476,106.68 ccw(c70.476,108.213) key.1@71.56,107.129 ; 70.476,106.68 cw(c70.476,105.147) key.1@71.56,106.231 ; 70.476,106.68 ccw(c70.476,108.213) key.1@71.56,107.129 ; 70.476,106.68 cw(c70.476,105.147) key.1@71.56,106.231 ; 70.476,106.68 ccw(c70.476,108.213) key.1@71.56,107.129 ; 70.476,106.68 cw(c70.476,105.147) key.1@71.56,106.231 ; 70.476,106.68 ccw(c70.476,108.213) key.1@71.56,107.129 ; 70.476,106.68 cw(c70.476,105.147) key.1@71.56,106.231 ; 71.089,106.68 cw(c71.089,105.76) key.1@71.74,106.411 ; 71.089,106.68 ccw(c71.089,107.6) key.1@71.74,106.949 ; 71.089,106.68 cw(c71.089,105.76) key.1@71.74,106.411 ; 71.089,106.68 ccw(c71.089,107.6) key.1@71.74,106.949 ; 71.089,106.68 ccw(c71.089,107.6) key.1@71.74,106.949 ; 71.089,106.68 cw(c71.089,105.76) key.1@71.74,106.411 ; 71.089,106.68 ccw(c71.089,107.6) key.1@71.74,106.949 ; 71.089,106.68 cw(c71.089,105.76) key.1@71.74,106.411 ; 71.089,106.68 ccw(c71.089,107.6) key.1@71.74,106.949 ; 71.089,106.68 cw(c71.089,105.76) key.1@71.74,106.411 ; 71.089,106.68 ccw(c71.089,107.6) key.1@71.74,106.949 ; 71.089,106.68 cw(c71.089,105.76) key.1@71.74,106.411 ; 71.089,106.68 ccw(c71.089,107.6) key.1@71.74,106.949 ; 71.089,106.68 cw(c71.089,105.76) key.1@71.74,106.411 ; 71.089,106.68 ccw(c71.089,107.6) key.1@71.74,106.949 ; 71.089,106.68 cw(c71.089,105.76) key.1@71.74,106.411